# Altium PCB CT310高端控制盒图数传接口电路V1.0.PcbDoc
Units mil, origin at the board's own origin, x right, y up, seen from the top; angles counter-clockwise.
Board outline 1740 x 520 mil, 2 copper layers (Top Layer, Bottom Layer); 4 components, 8 nets, 47 pads, 11 vias.
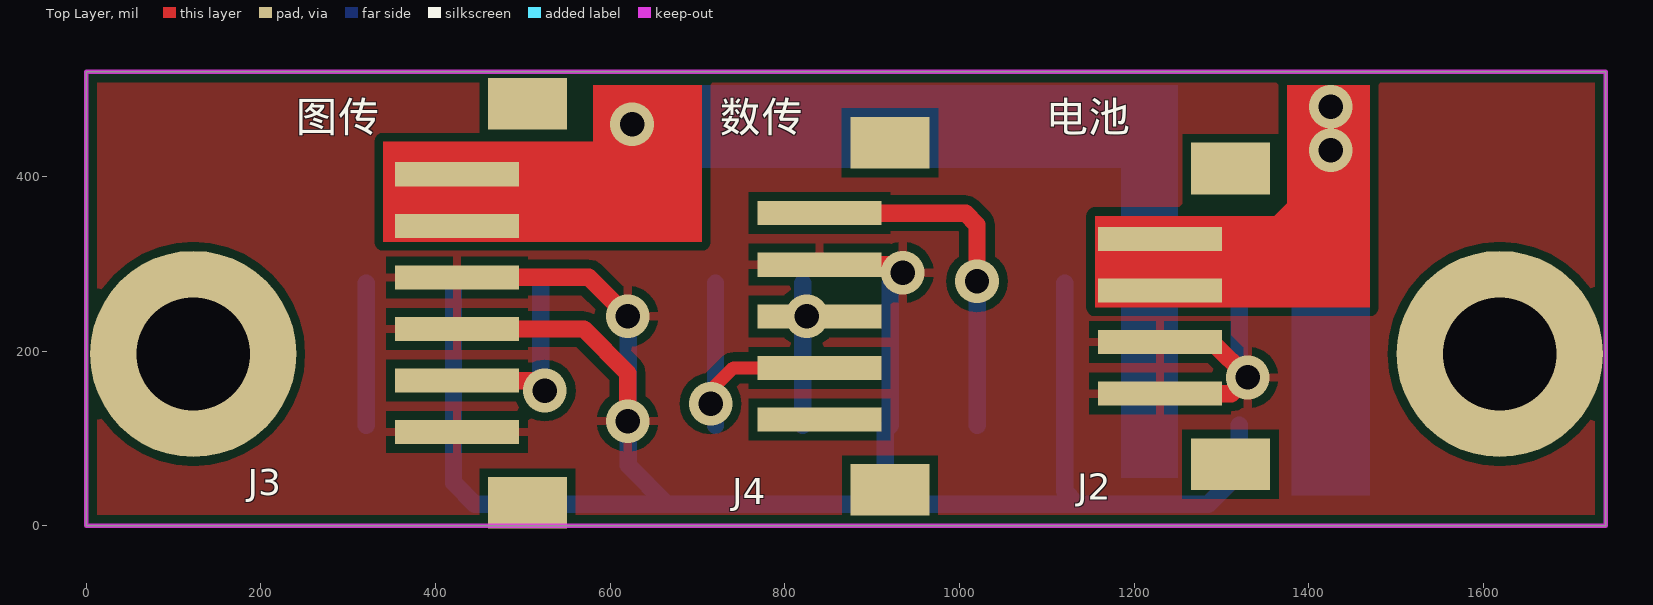
[diagram p0: Top Layer view]
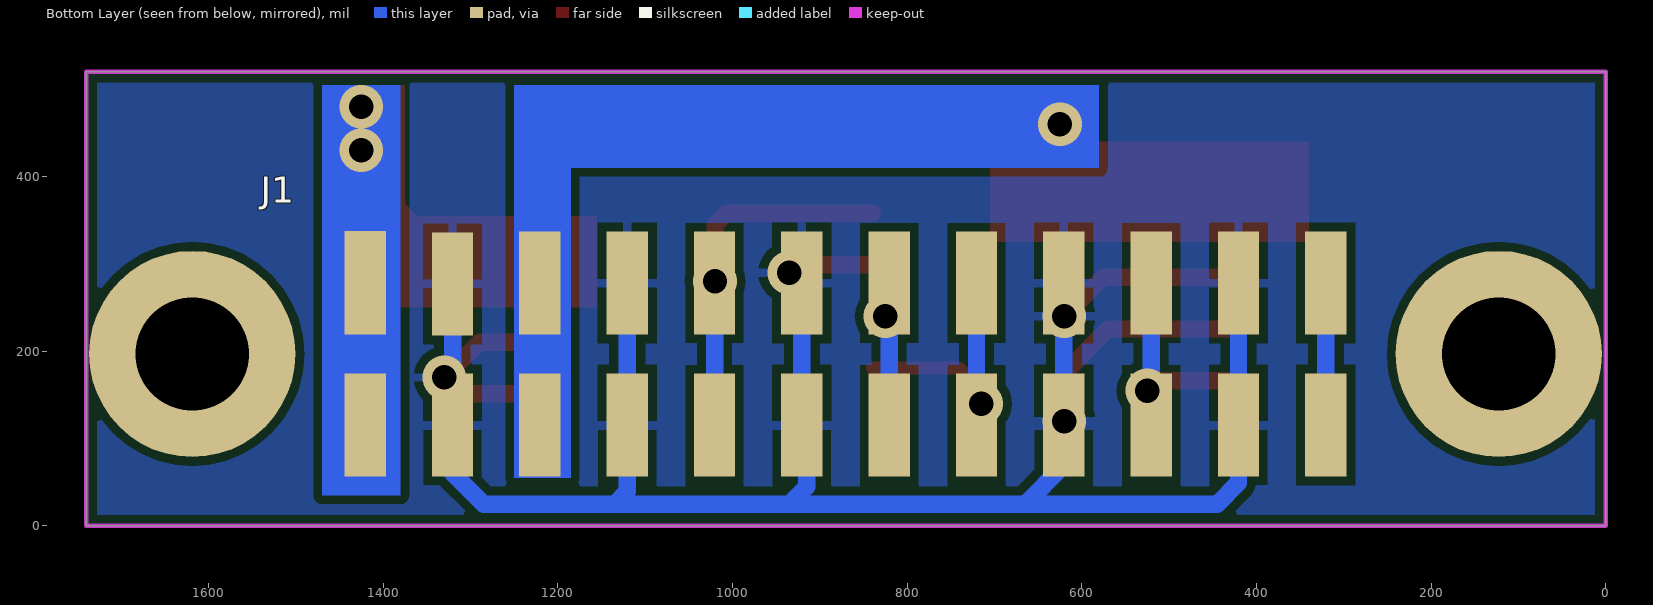
[diagram p1: Bottom Layer view, seen from below]
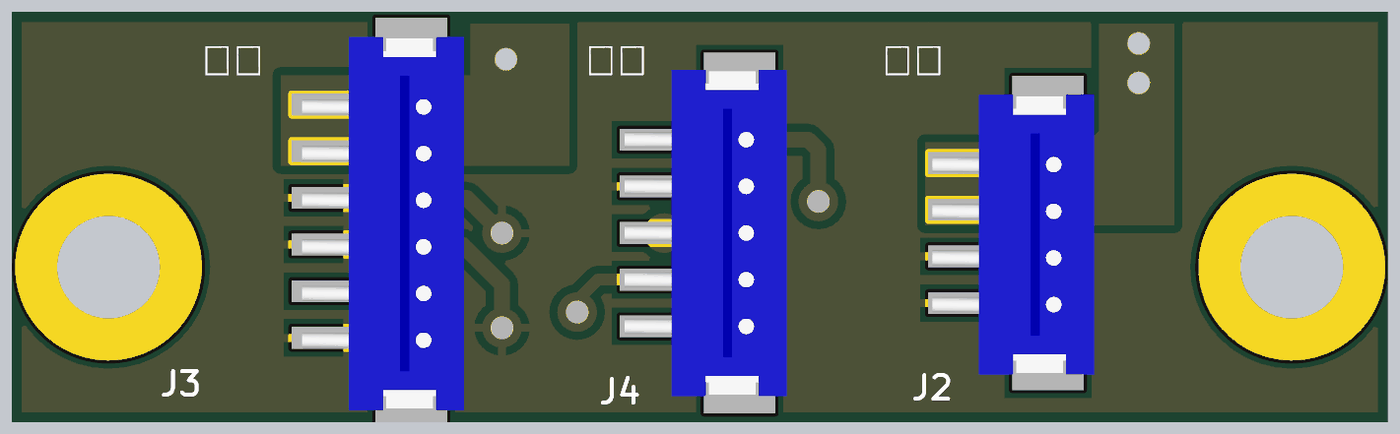
[diagram p2: 3D render of the assembled board from above, using the file's embedded part models]

## Layer stack, top to bottom
Top Layer: signal copper 1.4
Dielectric: dielectric 12.6, FR-4, Dk 4.8
Bottom Layer: signal copper 1.4

## Board outline
0,0 0,520 1740,520 1740,0 0,0

## Design rules (kind name [scope] priority, off if disabled: settings)
Clearance [All] p1: gap=10
PolygonConnect [All] p1: connectstyle=Relief reliefconductorwidth=10 reliefentries=4 polygonreliefangle="90 Angle" airgapwidth=10
RoutingVias [All] p1: holewidth=28 width=50 viastyle="Through Hole" minholewidth=28 minwidth=50 maxholewidth=28 maxwidth=50
SolderMaskExpansion [All] p1: expansion=4
Width [All] p1: maxlimit=100 minlimit=10 preferedwidth=10 minimp=50.000000 maximp=50.000000 favimp=50.000000
28 further rules are at their usual default settings.

## Components (designator, comment, footprint, x,y, rotation, side; value= is the part's Value field where it differs from the comment)
J1 "HD2X12S-2.54" HD2X12S-2.54 870.55,196.85 r180 bottom
J2 "ZH1X4LT-1.5" ZH1X4LT-1.5 1270,240 r270 top
J3 "ZH1X6LT-1.5" ZH1X6LT-1.5 465,255 r270 top
J4 "ZH1X5LT-1.5" ZH1X5LT-1.5 880,240 r270 top

## Footprints (in the part's own frame and the unit in brackets; to place one, negate y for a bottom-side part, rotate by r counter-clockwise, add the part's x,y. Pads: shape width x height; smd on the part's side, far side on the other; paste and mask are expansions set on the pad)
HD2X12S-2.54 [mm] "SOIC, 16-Leads, Body 10.6x7.7mm (max), Pitch 1.27mm, IPC Medium Density"
  rect 1.2x3 smd: 1(-13.97,-2.07) 2(-13.97,2.07) 3(-11.43,-2.07) 4(-11.43,2.04) 5(-8.89,-2.07) 6(-8.89,2.06) 7(-6.35,-2.07) 8(-6.35,2.06) 9(-3.81,-2.07) 10(-3.81,2.06) 11(-1.27,-2.07) 12(-1.27,2.06) 13(1.27,-2.07) 14(1.27,2.06) 15(3.81,-2.07) 16(3.81,2.06) 17(6.35,-2.07) 18(6.35,2.06) 19(8.89,-2.07) 20(8.89,2.06) 21(11.43,-2.07) 22(11.43,2.06) 23(13.97,-2.07) 24(13.97,2.06)
ZH1X4LT-1.5 [mm]
  rect 1.5x2.3 smd: 0(-4.3,1.025) 0(4.3,1.025)
  rect 0.7x3.6 smd: 1(-2.25,-1.025) 2(-0.75,-1.025) 3(0.75,-1.025) 4(2.25,-1.025)
  body extent -4.45,-2.69 4.55,2.51, height 5
ZH1X5LT-1.5 [mm]
  rect 1.5x2.3 smd: 0(-5.05,1.025) 0(5.05,1.025)
  rect 0.7x3.6 smd: 1(-3,-1.025) 2(-1.5,-1.025) 3(0,-1.025) 4(1.5,-1.025) 5(3,-1.025)
  body extent -5.25,-2.66 5.25,2.54, height 5
ZH1X6LT-1.5 [mm]
  rect 1.5x2.3 smd: 0(-5.8,1.025) 0(5.8,1.025)
  rect 0.7x3.6 smd: 1(-3.75,-1.025) 2(-2.25,-1.025) 3(-0.75,-1.025) 4(0.75,-1.025) 5(2.25,-1.025) 6(3.75,-1.025)
  body extent -5.92,-2.48 6.08,2.72, height 5

## Part data
J1: library part HEADER2X12
J2: library part HEADER1X4
J3: library part HEADER1X6
J4: library part HEADER1X5

## Free pads (board coordinates)
  round 236.22 hole 129.92: 0(122.52,196.85) 0(1618.58,196.85)

## Via types
v1: diameter 50, hole 28, Top Layer to Bottom Layer, tented both sides, 11 vias

## Nets (pads, with @x,y where several pads share a name; then routed paths per layer and width w, separated by ;. In a path a pad name is that pad's centre, name@x,y a point inside that pad or via, vN(x,y) a via of type N, cw(c..) or ccw(c..) an arc to the next point about the centre after c; other vN are vias at no path point)
12V: J1.5 J1.6 J3.1 J3.2 | length 1229.7
  Top Layer w20: J3.2 573.58,343.58 625,395 v1(625,460)
  Bottom Layer w20: v1(625,460) 650,485 1165,485 1220.55,429.45 J1.6 J1.5
+7.2V_S: J1.9 J1.10 J4.1 | length 413.4
  Top Layer w20: J4.1 1006.89,358.11 1020,345 v1(1020,280)
  Bottom Layer w20: J1.9 J1.10
BAT1+: J1.1 J1.2 J2.1 J2.2 | length 901.5
  Top Layer w20: J2.2 1404.53,269.53 1425,290 1425,405 ; J2.1 1348.58,328.58 1425,405 ; v1(1425,430) v1@1425,415 ; 1425,405 1430,410 v1@1425,415 ; 1425,405 v1@1425,415
  Bottom Layer w20: J1.1 J1.2 1420.55,425.55 v1(1425,430)
  other v1: 1425,480
CVBS: J1.19 J1.20 J3.5 | length 228
  Top Layer w20: J3.5 513.58,166.42 v1(525,155)
  Bottom Layer w20: J1.19@520.55,155 J1.20
LINE_IN_L: J1.23 J1.24 | length 162.6
  Bottom Layer w20: J1.23 J1.24
RS485_A4: J1.13 J1.14 J4.3 | length 211.4
  Top Layer w20: v1(825,240) 820,245 810,245 815,240 J4.3
  Bottom Layer w20: J1.13 J1.14
RS485_B4: J1.15 J1.16 J4.4 | length 317.1
  Top Layer w15: v1(715,140) 715,145 710,150 740.94,180.94 J4.4
  Bottom Layer w20: J1.15 J1.16
SGND: J1.3 J1.4 J1.7 J1.8 J1.11 J1.12 J1.17 J1.18 J1.21 J1.22 J2.3 J2.4 J3.3 J3.4 J3.6 J4.2 | length 2880.5
  Top Layer w20: J3.4 569.53,225.47 620,175 v1(620,120) ; J3.3 575.47,284.53 v1(620,240) ; J4.2 925.94,299.05 v1(935,290) ; J2.4 1311.42,151.42 v1(1330,170) 1289.53,210.47 J2.3
  Bottom Layer w20: J1.22 J1.21 420.55,49.45 445,25 665,25 ; J1.18@620.55,240 J1.17 620.55,69.45 665,25 ; J1.12 J1.11 915,109.8 915,45 935,25 ; J1.8 J1.7 1120.55,39.45 1135,25 ; J1.3 1320.55,60.55 1285,25 1135,25 ; J1.3@1320.55,170 J1.4 ; 665,25 935,25 ; 935,25 1135,25
pads on no net: J2.0 J3.0 J4.0 J4.5

## Polygon pours and split planes (outlines as drawn)
SGND on Top Layer "Keep-Out Layer-No Net" (solid, remove dead copper, pour order 2): 0,0 0,520 1740,520 1740,0 0,0
SGND on Bottom Layer "Keep-Out Layer-No Net" (solid, remove dead copper, pour order 4): 0,0 0,520 1740,520 1740,0 0,0

## Keep-outs
Keep-Out Layer:
  the board outline again, w5

## Other copper
Top Layer:
  rectangle net 12V: 580,325 705,505
  rectangle net 12V: 340,325 705,440
  rectangle net BAT1+: 1375,250 1470,505
  rectangle net BAT1+: 1155,250 1470,355
Bottom Layer:
  rectangle net 12V: 1185,55 1250,410
  rectangle net 12V: 580,410 1250,505
  rectangle net BAT1+: 1380,35 1470,505

## Silkscreen, mask and mechanical layers (free items; w line width, h text height)
Top Overlay:
  text "图传" at 240,440 h60
  text "数传" at 725,440 h60
  text "电池" at 1100,440 h60

## Dimensions
0,0 to 0,520 on Keep-Out Layer
0,0 to 1740,0 on Keep-Out Layer